# Altium PCB PCB1.PcbDoc (part 1 of 8)
Units mil, origin at the board's own origin, x right, y up, seen from the top; angles counter-clockwise.
Board outline 6000 x 4000 mil, 2 copper layers (Top Layer, Bottom Layer); 1253 components, 565 nets, 6549 pads, 0 vias.
Unrouted connection lines stored in the file: 1925.
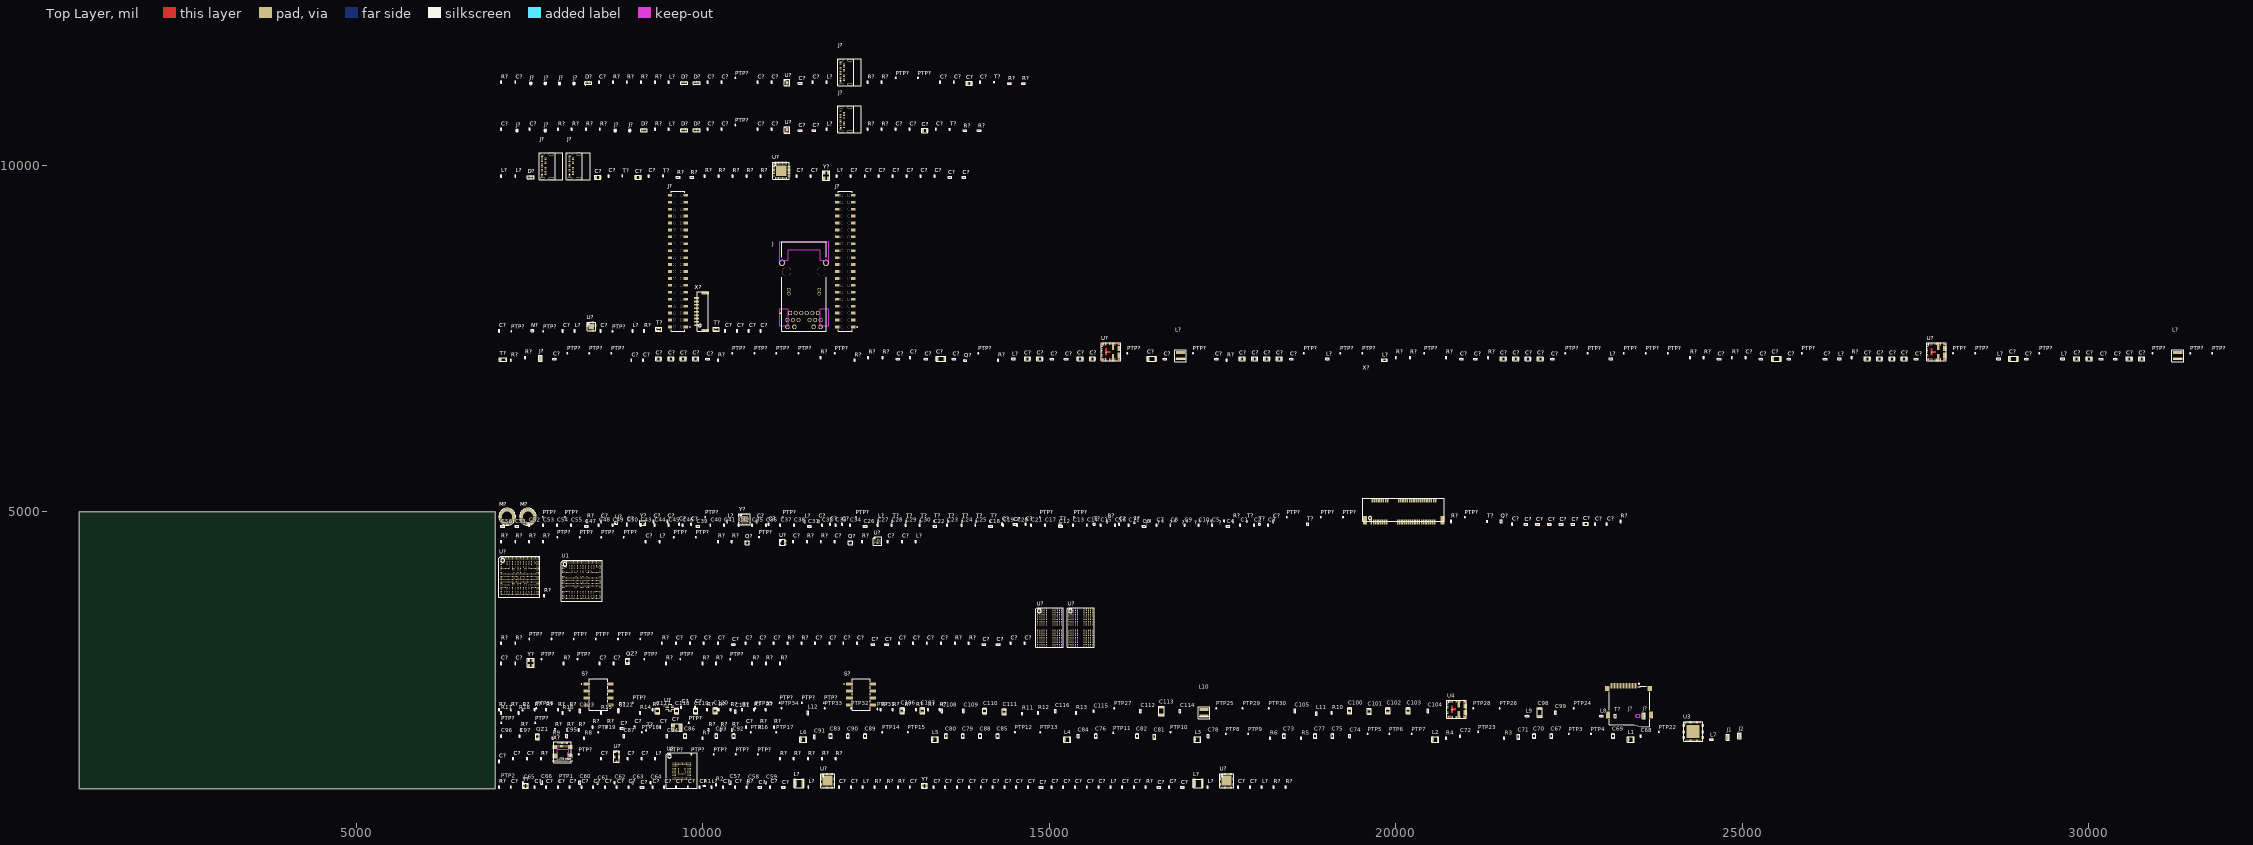
[diagram p0: Top Layer view]
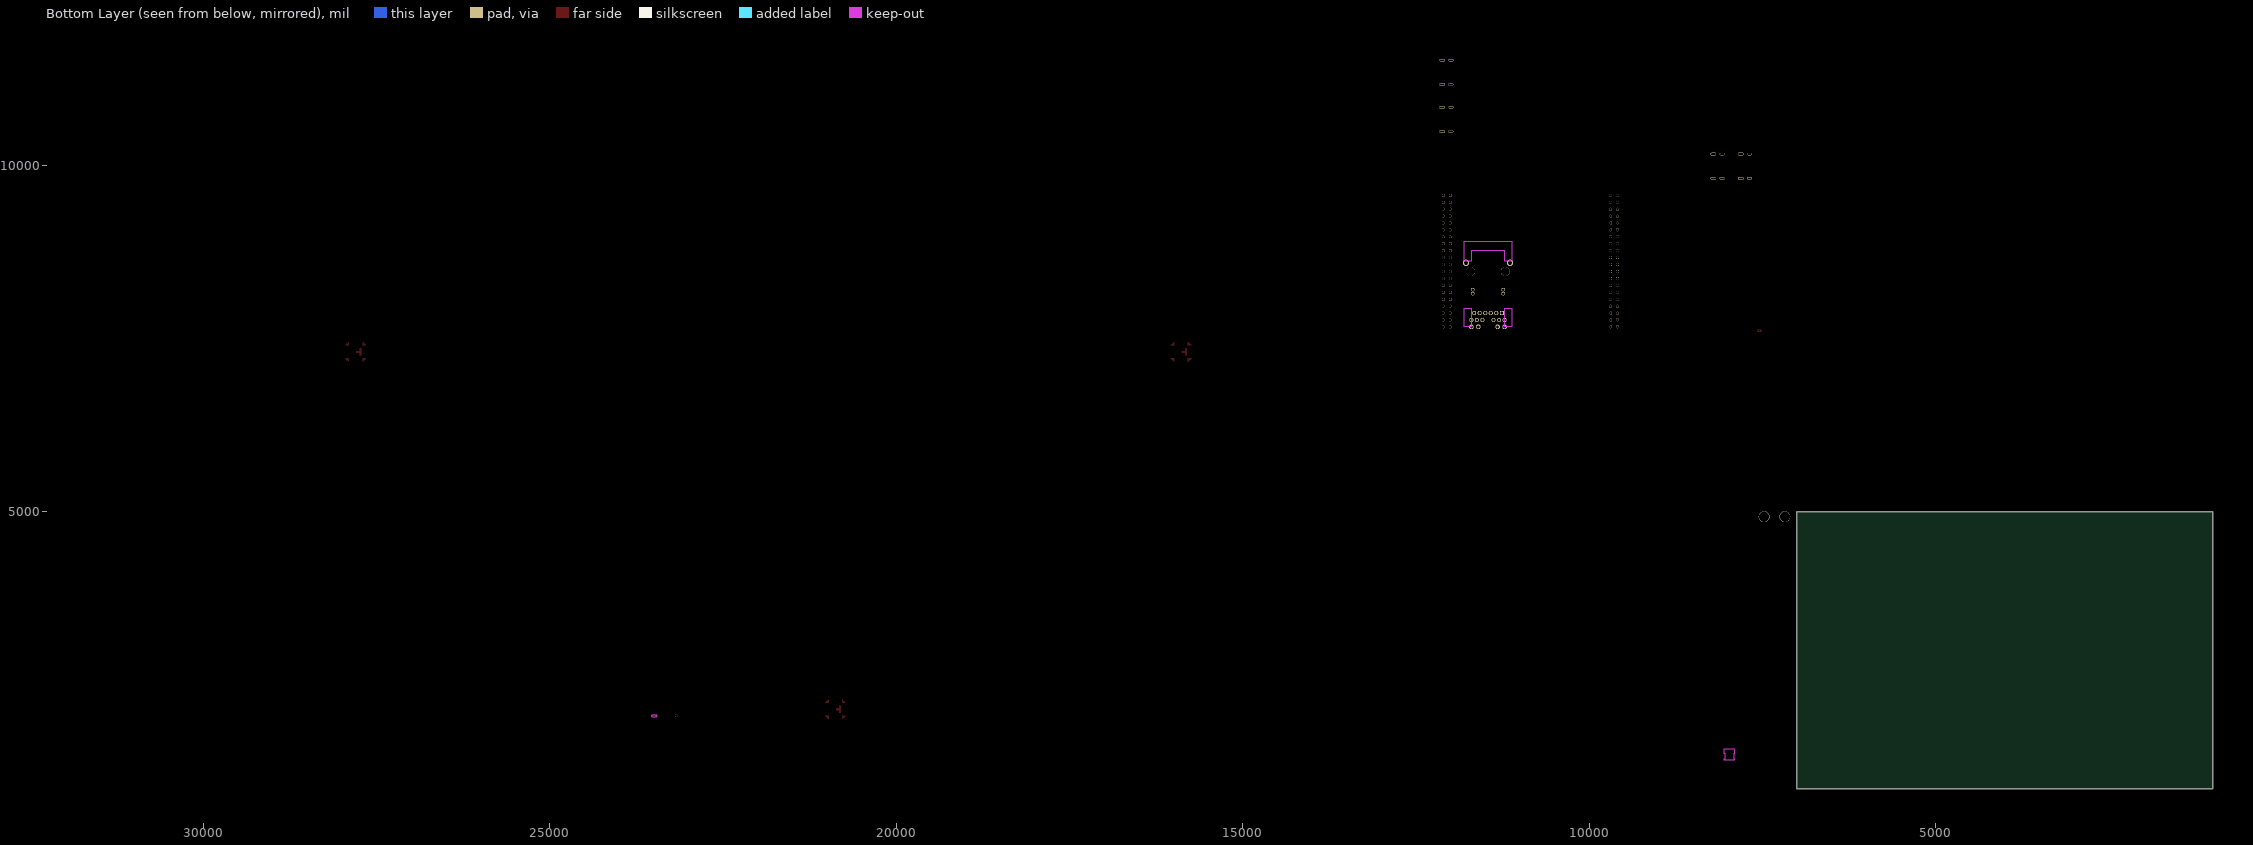
[diagram p1: Bottom Layer view, seen from below]

## Layer stack, top to bottom
Top Solder: solder mask 0.4, Solder Resist, Dk 3.5
Top Layer: signal copper 1.4
Dielectric 1: dielectric 12.6, FR-4, Dk 4.8
Bottom Layer: signal copper 1.4
Bottom Solder: solder mask 0.4, Solder Resist, Dk 3.5

## Board outline
1000,1000 7000,1000 7000,5000 1000,5000

## Design rules (kind name [scope] priority, off if disabled: settings)
Clearance [All] p1: gap=10 ignorepadtopadclearanceinfootprint=FALSE
DiffPairsRouting [All] p1: maxlimit=10 minlimit=10 mostfreqgap=10 toplayer_minwidth=15 toplayer_maxwidth=15 toplayer_prefwidth=15 bottomlayer_minwidth=15 bottomlayer_maxwidth=15 bottomlayer_prefwidth=15 maxuncoupledlength=500
MatchedLengths "Schematic Matched Net Lengths_7" [InNetClass('Ethernet')] p1: tolerance=15.75 checknetsindiffpair=TRUE checkdiffpairvsdiffpair=FALSE checkxsignals=FALSE checkothers=FALSE
MatchedLengths "Schematic Matched Net Lengths_6" [InNetClass('USB')] p2: tolerance=11.81 checknetsindiffpair=TRUE checkdiffpairvsdiffpair=FALSE checkxsignals=FALSE checkothers=FALSE
MatchedLengths "Schematic Matched Net Lengths_5" [InNetClass('PCIe')] p3: tolerance=3.94 checknetsindiffpair=TRUE checkdiffpairvsdiffpair=FALSE checkxsignals=FALSE checkothers=FALSE
MatchedLengths "Schematic Matched Net Lengths_4" [InNetClass('HDMI')] p4: tolerance=3.94 checknetsindiffpair=TRUE checkdiffpairvsdiffpair=FALSE checkxsignals=FALSE checkothers=FALSE
MatchedLengths "Schematic Matched Net Lengths_3" [InNetClass('Ethernet')] p5: tolerance=15.75 checknetsindiffpair=TRUE checkdiffpairvsdiffpair=FALSE checkxsignals=FALSE checkothers=FALSE
MatchedLengths "Schematic Matched Net Lengths_2" [InNetClass('USB')] p6: tolerance=11.81 checknetsindiffpair=TRUE checkdiffpairvsdiffpair=FALSE checkxsignals=FALSE checkothers=FALSE
MatchedLengths "Schematic Matched Net Lengths_1" [InNetClass('PCIe')] p7: tolerance=3.94 checknetsindiffpair=TRUE checkdiffpairvsdiffpair=FALSE checkxsignals=FALSE checkothers=FALSE
MatchedLengths "Schematic Matched Net Lengths" [InNetClass('HDMI')] p8: tolerance=3.94 checknetsindiffpair=TRUE checkdiffpairvsdiffpair=FALSE checkxsignals=FALSE checkothers=FALSE
PolygonConnect [All] p1: connectstyle=Relief reliefconductorwidth=10 reliefentries=4 polygonreliefangle="90 Angle" airgapwidth=10
RoutingVias [All] p1: holewidth=28 width=50 viastyle="Through Hole" minholewidth=28 minwidth=50 maxholewidth=28 maxwidth=50
SolderMaskExpansion [All] p1: expansion=4 istentingtop=FALSE
SupplyNets "Schematic Supply Nets_43" [InNet('3V3_ETH1_VDD')] p1: voltage=0.000
SupplyNets "Schematic Supply Nets_42" [InNet('1V8_PER')] p2: voltage=0.000
SupplyNets "Schematic Supply Nets_41" [InNet('VBUS_SMPS_FILT')] p3: voltage=0.000
SupplyNets "Schematic Supply Nets_40" [InNet('HDMI_5V0')] p4: voltage=0.000
SupplyNets "Schematic Supply Nets_39" [InNet('5V0_SMPS_RBC')] p5: voltage=0.000
SupplyNets "Schematic Supply Nets_38" [InNet('VDD_1V8_DIG')] p6: voltage=0.000
SupplyNets "Schematic Supply Nets_37" [InNet('3V3_ETH2_VDDA')] p7: voltage=0.000
SupplyNets "Schematic Supply Nets_36" [InNet('VBUS_RBC_FILT')] p8: voltage=0.000
SupplyNets "Schematic Supply Nets_35" [InNet('VBUS_SMPS')] p9: voltage=0.000
SupplyNets "Schematic Supply Nets_34" [InNet('3V3_ETH1_VDDA')] p10: voltage=0.000
SupplyNets "Schematic Supply Nets_33" [InNet('VBUS_RF_FILT')] p11: voltage=0.000
SupplyNets "Schematic Supply Nets_32" [InNet('mPCIe_SMPS_3V3')] p12: voltage=0.000
SupplyNets "Schematic Supply Nets_31" [InNet('3V3_USBHUB')] p13: voltage=0.000
SupplyNets "Schematic Supply Nets_30" [InNet('3V3_ETH2_VDD')] p14: voltage=0.000
SupplyNets "Schematic Supply Nets_29" [InNet('3V3_ETH1_VDD')] p15: voltage=0.000
SupplyNets "Schematic Supply Nets_28" [InNet('1V8_PER')] p16: voltage=0.000
SupplyNets "Schematic Supply Nets_27" [InNet('VBUS_SMPS_FILT')] p17: voltage=0.000
SupplyNets "Schematic Supply Nets_26" [InNet('HDMI_5V0')] p18: voltage=0.000
SupplyNets "Schematic Supply Nets_25" [InNet('5V0_SMPS_RBC')] p19: voltage=0.000
SupplyNets "Schematic Supply Nets_24" [InNet('VDD_1V8_DIG')] p20: voltage=0.000
SupplyNets "Schematic Supply Nets_23" [InNet('3V3_ETH2_VDDA')] p21: voltage=0.000
SupplyNets "Schematic Supply Nets_22" [InNet('VBUS_RBC_FILT')] p22: voltage=0.000
SupplyNets "Schematic Supply Nets_21" [InNet('VBUS_SMPS')] p23: voltage=0.000
SupplyNets "Schematic Supply Nets_20" [InNet('3V3_ETH1_VDDA')] p24: voltage=0.000
SupplyNets "Schematic Supply Nets_9" [InNet('VBUS_RF_FILT')] p25: voltage=0.000
SupplyNets "Schematic Supply Nets_8" [InNet('mPCIe_SMPS_3V3')] p26: voltage=0.000
SupplyNets "Schematic Supply Nets_7" [InNet('3V3_USBHUB')] p27: voltage=0.000
SupplyNets "Schematic Supply Nets_6" [InNet('3V3_ETH2_VDD')] p28: voltage=0.000
SupplyNets "Schematic Supply Nets_5" [InNet('5V0_SMPS')] p29: voltage=0.000
SupplyNets "Schematic Supply Nets_4" [InNet('VIN_SMPS')] p30: voltage=0.000
SupplyNets "Schematic Supply Nets_3" [InNet('3V3_SMPS')] p31: voltage=0.000
SupplyNets "Schematic Supply Nets_2" [InNet('VSYS_5V')] p32: voltage=0.000
SupplyNets "Schematic Supply Nets_1" [InNet('VSD_3V3')] p33: voltage=0.000
SupplyNets "Schematic Supply Nets" [InNet('VIN_SMPS_FILT')] p34: voltage=0.000
SupplyNets "Schematic Supply Nets_19" [InNet('NVCC_DRAM_1V1')] p35: voltage=0.000
SupplyNets "Schematic Supply Nets_18" [InNet('VDD_SNVS_0V8')] p36: voltage=0.000
SupplyNets "Schematic Supply Nets_17" [InNet('VDD_SOC')] p37: voltage=0.000
SupplyNets "Schematic Supply Nets_16" [InNet('VDD_3V3')] p38: voltage=0.000
SupplyNets "Schematic Supply Nets_15" [InNet('VDD_1V8')] p39: voltage=0.000
SupplyNets "Schematic Supply Nets_14" [InNet('GND')] p40: voltage=0.000
SupplyNets "Schematic Supply Nets_13" [InNet('VDD_ARM')] p41: voltage=0.000
SupplyNets "Schematic Supply Nets_12" [InNet('NVCC_SD2')] p42: voltage=0.000
SupplyNets "Schematic Supply Nets_11" [InNet('NVCC_SNVS_1V8')] p43: voltage=0.000
SupplyNets "Schematic Supply Nets_10" [InNet('VDDA_1V8')] p44: voltage=0.000
Width [All] p1: maxlimit=10 minlimit=10 preferedwidth=10
29 further rules are at their usual default settings.

## Classes and differential pairs
differential pair class 100: **LAN2_TXRXA **LAN2_TXRXB **LAN2_TXRXC **LAN2_TXRXD *LAN1_TXRXA *LAN1_TXRXB *LAN1_TXRXC *LAN1_TXRXD *LAN2_TXRXA *LAN2_TXRXB *LAN2_TXRXC *LAN2_TXRXD HDMI_TX0 HDMI_TX1 HDMI_TX2 HDMI_TXC LAN1_TXRXA LAN1_TXRXB LAN1_TXRXC LAN1_TXRXD LAN2_TXRXA LAN2_TXRXB LAN2_TXRXC LAN2_TXRXD
differential pair class 90: *PER1_TX1 *PER1_TX2 *PER2_TX1 *PER2_TX2 *USB_mPCIe PER1_RX1 PER1_RX2 PER1_TX1 PER1_TX2 PER2_RX1 PER2_RX2 PER2_TX1 PER2_TX2 USB1_D USB1_RX USB1_TX USB2_D USB2_HUB_UP USB2_RX USB2_TX USB_hub2 USB_hub3 USB_mPCIe
differential pair class 85: *mPCIe_CON_CLK *mPCIe_RX *mPCIe_TX DRAM_CK_A DRAM_CK_B DRAM_SDQS0_A DRAM_SDQS0_B DRAM_SDQS1_A DRAM_SDQS1_B mPCIe_CON_CLK mPCIe_RX mPCIe_TX PCIE_CLK PCIE_RX PCIE_TX
net class USB: *PER1_TX1_N *PER1_TX1_P *PER1_TX2_N *PER1_TX2_P *PER2_TX1_N *PER2_TX1_P *PER2_TX2_N *PER2_TX2_P *USB_mPCIe_N *USB_mPCIe_P PER1_RX1_N PER1_RX1_P PER1_RX2_N PER1_RX2_P PER1_TX1_N PER1_TX1_P PER1_TX2_N PER1_TX2_P PER2_RX1_N PER2_RX1_P PER2_RX2_N PER2_RX2_P PER2_TX1_N PER2_TX1_P PER2_TX2_N PER2_TX2_P USB1_D_N USB1_D_P USB1_RX_N USB1_RX_P USB1_TX_N USB1_TX_P USB2_D_N USB2_D_P USB2_HUB_UP_N USB2_HUB_UP_P USB2_RX_N USB2_RX_P USB2_TX_N USB2_TX_P USB_hub2_N USB_hub2_P USB_hub3_N USB_hub3_P USB_mPCIe_N USB_mPCIe_P
net class SINGLE: DRAM_CA0_A DRAM_CA0_B DRAM_CA1_A DRAM_CA1_B DRAM_CA2_A DRAM_CA2_B DRAM_CA3_A DRAM_CA3_B DRAM_CA4_A DRAM_CA4_B DRAM_CA5_A DRAM_CA5_B DRAM_CKE0_A DRAM_CKE0_B DRAM_CKE1_A DRAM_CKE1_B DRAM_DATA0_A DRAM_DATA0_B DRAM_DATA1_A DRAM_DATA1_B DRAM_DATA2_A DRAM_DATA2_B DRAM_DATA3_A DRAM_DATA3_B DRAM_DATA4_A DRAM_DATA4_B DRAM_DATA5_A DRAM_DATA5_B DRAM_DATA6_A DRAM_DATA6_B DRAM_DATA7_A DRAM_DATA7_B DRAM_DATA8_A DRAM_DATA8_B DRAM_DATA9_A DRAM_DATA9_B DRAM_DATA10_A DRAM_DATA10_B DRAM_DATA11_A DRAM_DATA11_B DRAM_DATA12_A DRAM_DATA12_B DRAM_DATA13_A DRAM_DATA13_B DRAM_DATA14_A DRAM_DATA14_B DRAM_DATA15_A DRAM_DATA15_B DRAM_DMI0_A DRAM_DMI0_B DRAM_DMI1_A DRAM_DMI1_B DRAM_nCS0_A DRAM_nCS0_B DRAM_nCS1_A DRAM_nCS1_B
net class SDIO: SD1_CLK SD1_CMD SD1_DATA0 SD1_DATA1 SD1_DATA2 SD1_DATA3 SD1_DATA4 SD1_DATA5 SD1_DATA6 SD1_DATA7 SD1_STROBE SD2_CLK SD2_CMD SD2_DATA0 SD2_DATA1 SD2_DATA2 SD2_DATA3
net class PCIe: *mPCIe_CON_CLK_N *mPCIe_CON_CLK_P *mPCIe_RX_N *mPCIe_RX_P *mPCIe_TX_N *mPCIe_TX_P mPCIe_CON_CLK_N mPCIe_CON_CLK_P mPCIe_RX_N mPCIe_RX_P mPCIe_TX_N mPCIe_TX_P PCIE_CLK_N PCIE_CLK_P PCIE_RX_N PCIE_RX_P PCIE_TX_N PCIE_TX_P
net class HDMI: HDMI_TX0_N HDMI_TX0_P HDMI_TX1_N HDMI_TX1_P HDMI_TX2_N HDMI_TX2_P HDMI_TXC_N HDMI_TXC_P
net class Ethernet: **LAN2_TXRXA_N **LAN2_TXRXA_P **LAN2_TXRXB_N **LAN2_TXRXB_P **LAN2_TXRXC_N **LAN2_TXRXC_P **LAN2_TXRXD_N **LAN2_TXRXD_P *LAN1_TXRXA_N *LAN1_TXRXA_P *LAN1_TXRXB_N *LAN1_TXRXB_P *LAN1_TXRXC_N *LAN1_TXRXC_P *LAN1_TXRXD_N *LAN1_TXRXD_P *LAN2_TXRXA_N *LAN2_TXRXA_P *LAN2_TXRXB_N *LAN2_TXRXB_P *LAN2_TXRXC_N *LAN2_TXRXC_P *LAN2_TXRXD_N *LAN2_TXRXD_P LAN1_TXRXA_N LAN1_TXRXA_P LAN1_TXRXB_N LAN1_TXRXB_P LAN1_TXRXC_N LAN1_TXRXC_P LAN1_TXRXD_N LAN1_TXRXD_P LAN2_TXRXA_N LAN2_TXRXA_P LAN2_TXRXB_N LAN2_TXRXB_P LAN2_TXRXC_N LAN2_TXRXC_P LAN2_TXRXD_N LAN2_TXRXD_P
net class DRAM: DRAM_CK_A_N DRAM_CK_A_P DRAM_CK_B_N DRAM_CK_B_P DRAM_SDQS0_A_N DRAM_SDQS0_A_P DRAM_SDQS0_B_N DRAM_SDQS0_B_P DRAM_SDQS1_A_N DRAM_SDQS1_A_P DRAM_SDQS1_B_N DRAM_SDQS1_B_P
component class USB_PER2: C? D? J? L? PTP? R? T? U?
component class USB_PER1: C? D? J? L? PTP? R? T? U?
component class USB_HUB: C? D? J? L? PTP? R? T? U? Y?
component class SYSTEM_INTERFACE: C? J J? L? N? PTP? R? T? U? X?
component class mPCIe_Slot: 1? ? C? L? M? PTP? Q? R? STP? T? U? X? Y?
component class IO_EXPANDER: C? L? PTP? Q? R? U?
component class IMX8_PHY: C? PTP? R? U?
component class IMX8_LPDDR4: C? PTP? R? U1 U?
component class IMX8_IO: C? PTP? QZ? R? Y?
component class IMX8_INTERFACE: C? PTP? R? S? U?
component class IMX8_DISPLAY: C? L? PTP? R? T? U? X?
component class ETHERNET: C? L? R? U? Y?
net class SEC: I2C1_SCL I2C1_SDA I2C2_SCL I2C2_SDA SD3_CLK SD3_CMD SD3_DATA0 SD3_DATA1 SD3_DATA2 SD3_DATA3 SD3_DATA4 SD3_DATA5 SD3_DATA6 SD3_DATA7
component class SMPS: C98 C99 C100 C101 C102 C103 C104 C105 C106 C107 C108 C109 C110 C111 C112 C113 C114 C115 C116 C117 C118 C119 C120 C121 C122 C123 C? CR? F? J? L8 L9 L10 L11 L12 L? PTP24 PTP25 PTP26 PTP27 PTP28 PTP29 PTP30 PTP31 PTP32 PTP33 PTP34 PTP35 PTP36 PTP? Q? R10 R11 R12 R13 R14 R15 R16 R17 R18 R? T? U4 U?
component class IMX8_PMIC: C67 C68 C69 C70 C71 C72 C73 C74 C75 C76 C77 C78 C79 C80 C81 C82 C83 C84 C85 C86 C87 C88 C89 C90 C91 C92 C93 C94 C95 C96 C97 J1 J2 L1 L2 L3 L4 L5 L6 L7 PTP3 PTP4 PTP5 PTP6 PTP7 PTP8 PTP9 PTP10 PTP11 PTP12 PTP13 PTP14 PTP15 PTP16 PTP17 PTP18 PTP19 PTP20 PTP21 PTP22 PTP23 QZ1 R3 R4 R5 R6 R7 R8 R9 U3
component class IMX8_eMMC: C57 C58 C59 C60 C61 C62 C63 C64 C65 C66 C? J? PTP1 PTP2 PTP? R1 R2 R? T? U2 U?
component class IMX8_PWR: C1 C2 C3 C4 C5 C6 C7 C8 C9 C10 C11 C12 C13 C14 C15 C16 C17 C18 C19 C20 C21 C22 C23 C24 C25 C26 C27 C28 C29 C30 C31 C32 C33 C34 C35 C36 C37 C38 C39 C40 C41 C42 C43 C44 C45 C46 C47 C48 C49 C50 C51 C52 C53 C54 C55 C56
differential pair USB_mPCIe: +USB_mPCIe_P -USB_mPCIe_N
differential pair USB_hub3: +USB_hub3_P -USB_hub3_N
differential pair USB_hub2: +USB_hub2_P -USB_hub2_N
differential pair USB2_TX: +USB2_TX_P -USB2_TX_N
differential pair USB2_RX: +USB2_RX_P -USB2_RX_N
differential pair USB2_HUB_UP: +USB2_HUB_UP_P -USB2_HUB_UP_N
differential pair USB2_D: +USB2_D_P -USB2_D_N
differential pair USB1_TX: +USB1_TX_P -USB1_TX_N
differential pair USB1_RX: +USB1_RX_P -USB1_RX_N
differential pair USB1_D: +USB1_D_P -USB1_D_N
differential pair PER2_TX2: +PER2_TX2_P -PER2_TX2_N
differential pair PER2_TX1: +PER2_TX1_P -PER2_TX1_N
differential pair PER2_RX2: +PER2_RX2_P -PER2_RX2_N
differential pair PER2_RX1: +PER2_RX1_P -PER2_RX1_N
differential pair PER1_TX2: +PER1_TX2_P -PER1_TX2_N
differential pair PER1_TX1: +PER1_TX1_P -PER1_TX1_N
differential pair PER1_RX2: +PER1_RX2_P -PER1_RX2_N
differential pair PER1_RX1: +PER1_RX1_P -PER1_RX1_N
differential pair PCIE_TX: +PCIE_TX_P -PCIE_TX_N
differential pair PCIE_RX: +PCIE_RX_P -PCIE_RX_N
differential pair PCIE_CLK: +PCIE_CLK_P -PCIE_CLK_N
differential pair mPCIe_TX: +mPCIe_TX_P -mPCIe_TX_N
differential pair mPCIe_RX: +mPCIe_RX_P -mPCIe_RX_N
differential pair mPCIe_CON_CLK: +mPCIe_CON_CLK_P -mPCIe_CON_CLK_N
differential pair LAN2_TXRXD: +LAN2_TXRXD_P -LAN2_TXRXD_N
differential pair LAN2_TXRXC: +LAN2_TXRXC_P -LAN2_TXRXC_N
differential pair LAN2_TXRXB: +LAN2_TXRXB_P -LAN2_TXRXB_N
differential pair LAN2_TXRXA: +LAN2_TXRXA_P -LAN2_TXRXA_N
differential pair LAN1_TXRXD: +LAN1_TXRXD_P -LAN1_TXRXD_N
differential pair LAN1_TXRXC: +LAN1_TXRXC_P -LAN1_TXRXC_N
differential pair LAN1_TXRXB: +LAN1_TXRXB_P -LAN1_TXRXB_N
differential pair LAN1_TXRXA: +LAN1_TXRXA_P -LAN1_TXRXA_N
differential pair HDMI_TXC: +HDMI_TXC_P -HDMI_TXC_N
differential pair HDMI_TX2: +HDMI_TX2_P -HDMI_TX2_N
differential pair HDMI_TX1: +HDMI_TX1_P -HDMI_TX1_N
differential pair HDMI_TX0: +HDMI_TX0_P -HDMI_TX0_N
differential pair DRAM_SDQS1_B: +DRAM_SDQS1_B_P -DRAM_SDQS1_B_N
differential pair DRAM_SDQS1_A: +DRAM_SDQS1_A_P -DRAM_SDQS1_A_N
differential pair DRAM_SDQS0_B: +DRAM_SDQS0_B_P -DRAM_SDQS0_B_N
differential pair DRAM_SDQS0_A: +DRAM_SDQS0_A_P -DRAM_SDQS0_A_N
differential pair DRAM_CK_B: +DRAM_CK_B_P -DRAM_CK_B_N
differential pair DRAM_CK_A: +DRAM_CK_A_P -DRAM_CK_A_N
differential pair *USB_mPCIe: +*USB_mPCIe_P -*USB_mPCIe_N
differential pair *PER2_TX2: +*PER2_TX2_P -*PER2_TX2_N
differential pair *PER2_TX1: +*PER2_TX1_P -*PER2_TX1_N
differential pair *PER1_TX2: +*PER1_TX2_P -*PER1_TX2_N
differential pair *PER1_TX1: +*PER1_TX1_P -*PER1_TX1_N
differential pair *mPCIe_TX: +*mPCIe_TX_P -*mPCIe_TX_N
differential pair *mPCIe_RX: +*mPCIe_RX_P -*mPCIe_RX_N
differential pair *mPCIe_CON_CLK: +*mPCIe_CON_CLK_P -*mPCIe_CON_CLK_N
differential pair *LAN2_TXRXD: +*LAN2_TXRXD_P -*LAN2_TXRXD_N
differential pair *LAN2_TXRXC: +*LAN2_TXRXC_P -*LAN2_TXRXC_N
differential pair *LAN2_TXRXB: +*LAN2_TXRXB_P -*LAN2_TXRXB_N
differential pair *LAN2_TXRXA: +*LAN2_TXRXA_P -*LAN2_TXRXA_N
differential pair *LAN1_TXRXD: +*LAN1_TXRXD_P -*LAN1_TXRXD_N
differential pair *LAN1_TXRXC: +*LAN1_TXRXC_P -*LAN1_TXRXC_N
differential pair *LAN1_TXRXB: +*LAN1_TXRXB_P -*LAN1_TXRXB_N
differential pair *LAN1_TXRXA: +*LAN1_TXRXA_P -*LAN1_TXRXA_N
differential pair **LAN2_TXRXD: +**LAN2_TXRXD_P -**LAN2_TXRXD_N
differential pair **LAN2_TXRXC: +**LAN2_TXRXC_P -**LAN2_TXRXC_N
differential pair **LAN2_TXRXB: +**LAN2_TXRXB_P -**LAN2_TXRXB_N
differential pair **LAN2_TXRXA: +**LAN2_TXRXA_P -**LAN2_TXRXA_N
differential pair USB_mPCIe: +USB_mPCIe_P -USB_mPCIe_N
differential pair USB_hub3: +USB_hub3_P -USB_hub3_N
differential pair USB_hub2: +USB_hub2_P -USB_hub2_N
differential pair USB2_TX: +USB2_TX_P -USB2_TX_N
differential pair USB2_RX: +USB2_RX_P -USB2_RX_N
differential pair USB2_HUB_UP: +USB2_HUB_UP_P -USB2_HUB_UP_N
differential pair USB2_D: +USB2_D_P -USB2_D_N
differential pair USB1_TX: +USB1_TX_P -USB1_TX_N
differential pair USB1_RX: +USB1_RX_P -USB1_RX_N
differential pair USB1_D: +USB1_D_P -USB1_D_N
differential pair PER2_TX2: +PER2_TX2_P -PER2_TX2_N
differential pair PER2_TX1: +PER2_TX1_P -PER2_TX1_N
differential pair PER2_RX2: +PER2_RX2_P -PER2_RX2_N
differential pair PER2_RX1: +PER2_RX1_P -PER2_RX1_N
differential pair PER1_TX2: +PER1_TX2_P -PER1_TX2_N
differential pair PER1_TX1: +PER1_TX1_P -PER1_TX1_N
differential pair PER1_RX2: +PER1_RX2_P -PER1_RX2_N
differential pair PER1_RX1: +PER1_RX1_P -PER1_RX1_N
differential pair PCIE_TX: +PCIE_TX_P -PCIE_TX_N
differential pair PCIE_RX: +PCIE_RX_P -PCIE_RX_N
differential pair PCIE_CLK: +PCIE_CLK_P -PCIE_CLK_N
differential pair mPCIe_TX: +mPCIe_TX_P -mPCIe_TX_N
differential pair mPCIe_RX: +mPCIe_RX_P -mPCIe_RX_N
differential pair mPCIe_CON_CLK: +mPCIe_CON_CLK_P -mPCIe_CON_CLK_N
differential pair LAN2_TXRXD: +LAN2_TXRXD_P -LAN2_TXRXD_N
differential pair LAN2_TXRXC: +LAN2_TXRXC_P -LAN2_TXRXC_N
differential pair LAN2_TXRXB: +LAN2_TXRXB_P -LAN2_TXRXB_N
differential pair LAN2_TXRXA: +LAN2_TXRXA_P -LAN2_TXRXA_N
differential pair LAN1_TXRXD: +LAN1_TXRXD_P -LAN1_TXRXD_N
differential pair LAN1_TXRXC: +LAN1_TXRXC_P -LAN1_TXRXC_N
differential pair LAN1_TXRXB: +LAN1_TXRXB_P -LAN1_TXRXB_N
differential pair LAN1_TXRXA: +LAN1_TXRXA_P -LAN1_TXRXA_N
differential pair HDMI_TXC: +HDMI_TXC_P -HDMI_TXC_N
differential pair HDMI_TX2: +HDMI_TX2_P -HDMI_TX2_N
differential pair HDMI_TX1: +HDMI_TX1_P -HDMI_TX1_N
differential pair HDMI_TX0: +HDMI_TX0_P -HDMI_TX0_N
differential pair DRAM_SDQS1_B: +DRAM_SDQS1_B_P -DRAM_SDQS1_B_N
differential pair DRAM_SDQS1_A: +DRAM_SDQS1_A_P -DRAM_SDQS1_A_N
differential pair DRAM_SDQS0_B: +DRAM_SDQS0_B_P -DRAM_SDQS0_B_N
differential pair DRAM_SDQS0_A: +DRAM_SDQS0_A_P -DRAM_SDQS0_A_N
differential pair DRAM_CK_B: +DRAM_CK_B_P -DRAM_CK_B_N
differential pair DRAM_CK_A: +DRAM_CK_A_P -DRAM_CK_A_N
differential pair *USB_mPCIe: +*USB_mPCIe_P -*USB_mPCIe_N
differential pair *PER2_TX2: +*PER2_TX2_P -*PER2_TX2_N
differential pair *PER2_TX1: +*PER2_TX1_P -*PER2_TX1_N
differential pair *PER1_TX2: +*PER1_TX2_P -*PER1_TX2_N
differential pair *PER1_TX1: +*PER1_TX1_P -*PER1_TX1_N
differential pair *mPCIe_TX: +*mPCIe_TX_P -*mPCIe_TX_N
differential pair *mPCIe_RX: +*mPCIe_RX_P -*mPCIe_RX_N
differential pair *mPCIe_CON_CLK: +*mPCIe_CON_CLK_P -*mPCIe_CON_CLK_N
differential pair *LAN2_TXRXD: +*LAN2_TXRXD_P -*LAN2_TXRXD_N
differential pair *LAN2_TXRXC: +*LAN2_TXRXC_P -*LAN2_TXRXC_N
differential pair *LAN2_TXRXB: +*LAN2_TXRXB_P -*LAN2_TXRXB_N
differential pair *LAN2_TXRXA: +*LAN2_TXRXA_P -*LAN2_TXRXA_N
differential pair *LAN1_TXRXD: +*LAN1_TXRXD_P -*LAN1_TXRXD_N
differential pair *LAN1_TXRXC: +*LAN1_TXRXC_P -*LAN1_TXRXC_N
differential pair *LAN1_TXRXB: +*LAN1_TXRXB_P -*LAN1_TXRXB_N
differential pair *LAN1_TXRXA: +*LAN1_TXRXA_P -*LAN1_TXRXA_N
differential pair **LAN2_TXRXD: +**LAN2_TXRXD_P -**LAN2_TXRXD_N
differential pair **LAN2_TXRXC: +**LAN2_TXRXC_P -**LAN2_TXRXC_N
differential pair **LAN2_TXRXB: +**LAN2_TXRXB_P -**LAN2_TXRXB_N
differential pair **LAN2_TXRXA: +**LAN2_TXRXA_P -**LAN2_TXRXA_N

## Components (designator, comment, footprint, x,y, rotation, side; value= is the part's Value field where it differs from the comment)
1? "TVS_0201_004_EZAEG1N" TVS_0201_EZAEG 16230,4840 r0 top value=0.04pF
1? "TVS_0201_004_EZAEG1N" TVS_0201_EZAEG 16230,4840 r0 top value=0.04pF
? "TVS_0201_004_EZAEG1N" TVS_0201_EZAEG 17525,4865 r90 top value=0.04pF
? "TVS_0201_004_EZAEG1N" TVS_0201_EZAEG 16815,4865 r90 top value=0.04pF
? "TVS_0201_004_EZAEG1N" TVS_0201_EZAEG 16990,4865 r90 top value=0.04pF
? "TVS_0201_004_EZAEG1N" TVS_0201_EZAEG 17170,4865 r90 top value=0.04pF
? "TVS_0201_004_EZAEG1N" TVS_0201_EZAEG 16635,4865 r90 top value=0.04pF
? "TVS_0201_004_EZAEG1N" TVS_0201_EZAEG 17345,4865 r90 top value=0.04pF
? "TVS_0201_004_EZAEG1N" TVS_0201_EZAEG 16460,4865 r90 top value=0.04pF
? "TVS_0201_004_EZAEG1N" TVS_0201_EZAEG 17525,4865 r90 top value=0.04pF
? "TVS_0201_004_EZAEG1N" TVS_0201_EZAEG 16815,4865 r90 top value=0.04pF
? "TVS_0201_004_EZAEG1N" TVS_0201_EZAEG 16990,4865 r90 top value=0.04pF
? "TVS_0201_004_EZAEG1N" TVS_0201_EZAEG 17170,4865 r90 top value=0.04pF
? "TVS_0201_004_EZAEG1N" TVS_0201_EZAEG 16635,4865 r90 top value=0.04pF
? "TVS_0201_004_EZAEG1N" TVS_0201_EZAEG 17345,4865 r90 top value=0.04pF
? "TVS_0201_004_EZAEG1N" TVS_0201_EZAEG 16460,4865 r90 top value=0.04pF
C1 "CAP_0201_1uF_X6S" CAP_0201_UN1Q 17760,4805 r90 top value=1uF
C2 "CAP_0201_1uF_X6S" CAP_0201_UN1Q 17960,4805 r90 top value=1uF
C3 "CAP_0201_1uF_X6S" CAP_0201_UN1Q 18160,4805 r90 top value=1uF
C4 "CAP_0402_10u_X6S" CAP_0402_H09W07_UN1Q 17580,4785 r0 top value=10uF
C5 "CAP_0201_220n_10V_X6S" CAP_0201_UN1Q 17355,4805 r90 top value=220nF
C6 "CAP_0402_10u_X6S" CAP_0402_H09W07_UN1Q 16370,4785 r0 top value=10uF
C7 "CAP_0201_1uF_X6S" CAP_0201_UN1Q 16550,4805 r90 top value=1uF
C8 "CAP_0201_1uF_X6S" CAP_0201_UN1Q 16750,4805 r90 top value=1uF
C9 "CAP_0201_1uF_X6S" CAP_0201_UN1Q 16955,4805 r90 top value=1uF
C10 "CAP_0201_1uF_X6S" CAP_0201_UN1Q 17155,4805 r90 top value=1uF
C11 "CAP_0201_220n_10V_X6S" CAP_0201_UN1Q 16150,4805 r90 top value=220nF
C12 "CAP_0402_10u_X6S" CAP_0402_H09W07_UN1Q 15165,4785 r0 top value=10uF
C13 "CAP_0201_1uF_X6S" CAP_0201_UN1Q 15345,4805 r90 top value=1uF
C14 "CAP_0201_1uF_X6S" CAP_0201_UN1Q 15545,4805 r90 top value=1uF
C15 "CAP_0201_1uF_X6S" CAP_0201_UN1Q 15745,4805 r90 top value=1uF
C16 "CAP_0201_1uF_X6S" CAP_0201_UN1Q 15950,4805 r90 top value=1uF
C17 "CAP_0201_1uF_X6S" CAP_0201_UN1Q 14940,4805 r90 top value=1uF
C18 "CAP_0402_10u_X6S" CAP_0402_H09W07_UN1Q 14155,4785 r0 top value=10uF
C19 "CAP_0201_1uF_X6S" CAP_0201_UN1Q 14335,4805 r90 top value=1uF
C20 "CAP_0201_1uF_X6S" CAP_0201_UN1Q 14540,4805 r90 top value=1uF
C21 "CAP_0201_1uF_X6S" CAP_0201_UN1Q 14740,4805 r90 top value=1uF
C22 "CAP_0402_10u_X6S" CAP_0402_H09W07_UN1Q 13350,4785 r0 top value=10uF
C23 "CAP_0201_1uF_X6S" CAP_0201_UN1Q 13530,4805 r90 top value=1uF
C24 "CAP_0201_1uF_X6S" CAP_0201_UN1Q 13735,4805 r90 top value=1uF
C25 "CAP_0201_1uF_X6S" CAP_0201_UN1Q 13935,4805 r90 top value=1uF
C26 "CAP_0402_10u_X6S" CAP_0402_H09W07_UN1Q 12345,4785 r0 top value=10uF
C27 "CAP_0201_1uF_X6S" CAP_0201_UN1Q 12525,4805 r90 top value=1uF
C28 "CAP_0201_1uF_X6S" CAP_0201_UN1Q 12725,4805 r90 top value=1uF
C29 "CAP_0201_1uF_X6S" CAP_0201_UN1Q 12930,4805 r90 top value=1uF
C30 "CAP_0201_1uF_X6S" CAP_0201_UN1Q 13130,4805 r90 top value=1uF
C31 "CAP_0402_10u_X6S" CAP_0402_H09W07_UN1Q 11540,4785 r0 top value=10uF
C32 "CAP_0201_1uF_X6S" CAP_0201_UN1Q 11720,4805 r90 top value=1uF
C33 "CAP_0201_1uF_X6S" CAP_0201_UN1Q 11920,4805 r90 top value=1uF
C34 "CAP_0201_1uF_X6S" CAP_0201_UN1Q 12125,4805 r90 top value=1uF
C35 "CAP_0201_1uF_X6S" CAP_0201_UN1Q 10715,4805 r90 top value=1uF
C36 "CAP_0201_1uF_X6S" CAP_0201_UN1Q 10915,4805 r90 top value=1uF
C37 "CAP_0201_1uF_X6S" CAP_0201_UN1Q 11120,4805 r90 top value=1uF
C38 "CAP_0201_1uF_X6S" CAP_0201_UN1Q 11320,4805 r90 top value=1uF
C39 "CAP_0402_10u_X6S" CAP_0402_H09W07_UN1Q 9930,4785 r0 top value=10uF
C40 "CAP_0201_1uF_X6S" CAP_0201_UN1Q 10110,4805 r90 top value=1uF
C41 "CAP_0201_1uF_X6S" CAP_0201_UN1Q 10310,4805 r90 top value=1uF
C42 "CAP_0201_1uF_X6S" CAP_0201_UN1Q 10515,4805 r90 top value=1uF
C43 "CAP_0201_1uF_X6S" CAP_0201_UN1Q 9105,4805 r90 top value=1uF
C44 "CAP_0201_1uF_X6S" CAP_0201_UN1Q 9305,4805 r90 top value=1uF
C45 "CAP_0201_1uF_X6S" CAP_0201_UN1Q 9505,4805 r90 top value=1uF
C46 "CAP_0201_1uF_X6S" CAP_0201_UN1Q 9710,4805 r90 top value=1uF
C47 "CAP_0402_10u_X6S" CAP_0402_H09W07_UN1Q 8320,4785 r0 top value=10uF
C48 "CAP_0201_1uF_X6S" CAP_0201_UN1Q 8500,4805 r90 top value=1uF
C49 "CAP_0201_1uF_X6S" CAP_0201_UN1Q 8700,4805 r90 top value=1uF
C50 "CAP_0201_1uF_X6S" CAP_0201_UN1Q 8905,4805 r90 top value=1uF
C51 "CAP_0402_10u_X6S" CAP_0402_H09W07_UN1Q 7315,4785 r0 top value=10uF
C52 "CAP_0201_1uF_X6S" CAP_0201_UN1Q 7495,4805 r90 top value=1uF
C53 "CAP_0201_1uF_X6S" CAP_0201_UN1Q 7695,4805 r90 top value=1uF
C54 "CAP_0201_1uF_X6S" CAP_0201_UN1Q 7895,4805 r90 top value=1uF
C55 "CAP_0201_1uF_X6S" CAP_0201_UN1Q 8100,4805 r90 top value=1uF
C56 "CAP_0402_4u7_10V_X6S" CAP_0402_H09W07_UN1Q 7110,4785 r0 top value=4.7uF
C57 "CAP_0402_4u7_10V_X6S" CAP_0402_H09W07_UN1Q 10395,1090 r90 top value=4.7uF
C58 "CAP_0201_220n_10V_X6S" CAP_0201_UN1Q 10650,1090 r90 top value=220nF
C59 "CAP_0201_220n_10V_X6S" CAP_0201_UN1Q 10910,1090 r90 top value=220nF
C60 "CAP_0402_10u_X6S" CAP_0402_H09W07_UN1Q 8225,1090 r90 top value=10uF
C61 "CAP_0201_220n_10V_X6S" CAP_0201_UN1Q 8480,1080 r90 top value=220nF
C62 "CAP_0201_220n_10V_X6S" CAP_0201_UN1Q 8725,1090 r90 top value=220nF
C63 "CAP_0201_220n_10V_X6S" CAP_0201_UN1Q 8985,1090 r90 top value=220nF
C64 "CAP_0201_220n_10V_X6S" CAP_0201_UN1Q 9245,1090 r90 top value=220nF
C65 "CAP_0201_220n_10V_X6S" CAP_0201_UN1Q 7410,1090 r90 top value=220nF
C66 "CAP_0402_10u_X6S" CAP_0402_H09W07_UN1Q 7675,1090 r90 top value=10uF
C67 "CAP_0603_10u_10V_X7R" CAP_0603_UN1Q 22250,1760 r90 top value=10uF
C68 "CAP_0201_1uF_X6S" CAP_0201_UN1Q 23540,1760 r90 top value=1uF
C69 "CAP_0603_10u_10V_X7R" CAP_0603_UN1Q 23140,1760 r90 top value=10uF
C70 "CAP_0603_NA" CAP_0603_UN1Q 22000,1760 r90 top value=NA
C71 "CAP_0603_22u_6.3V_X6S" CAP_0603_UN1Q 21775,1750 r90 top value=22uF
C72 "CAP_0201_1uF_X6S" CAP_0201_UN1Q 20930,1760 r90 top value=1uF
C73 "CAP_0603_10u_10V_X7R" CAP_0603_UN1Q 18390,1760 r90 top value=10uF
C74 "CAP_0402_10u_X6S" CAP_0402_H09W07_UN1Q 19340,1760 r90 top value=10uF
C75 "CAP_0603_NA" CAP_0603_UN1Q 19090,1760 r90 top value=NA
C76 "CAP_0603_10u_10V_X7R" CAP_0603_UN1Q 15675,1760 r90 top value=10uF
C77 "CAP_0603_22u_6.3V_X6S" CAP_0603_UN1Q 18840,1760 r90 top value=22uF
C78 "CAP_0402_4u7_10V_X6S" CAP_0402_H09W07_UN1Q 17295,1760 r90 top value=4.7uF
C79 "CAP_0603_10u_10V_X7R" CAP_0603_UN1Q 13755,1760 r90 top value=10uF
C80 "CAP_0603_10u_10V_X7R" CAP_0603_UN1Q 13510,1760 r90 top value=10uF
C81 "CAP_0603_NA" CAP_0603_UN1Q 16520,1750 r90 top value=NA
C82 "CAP_0603_22u_6.3V_X6S" CAP_0603_UN1Q 16270,1760 r90 top value=22uF
C83 "CAP_0603_10u_10V_X7R" CAP_0603_UN1Q 11845,1760 r90 top value=10uF
C84 "CAP_0402_4u7_10V_X6S" CAP_0402_H09W07_UN1Q 15420,1760 r90 top value=4.7uF
C85 "CAP_0603_NA" CAP_0603_UN1Q 14255,1760 r90 top value=NA
C86 "CAP_0603_10u_10V_X7R" CAP_0603_UN1Q 9745,1760 r90 top value=10uF
C87 "CAP_0402_1uF_10V_X7R" CAP_0402_UN1Q 8860,1760 r90 top value=1uF
C88 "CAP_0603_22u_6.3V_X6S" CAP_0603_UN1Q 14005,1760 r90 top value=22uF
C89 "CAP_0603_NA" CAP_0603_UN1Q 12345,1760 r90 top value=NA
C90 "CAP_0603_22u_6.3V_X6S" CAP_0603_UN1Q 12095,1760 r90 top value=22uF
C91 "CAP_0402_1uF_10V_X7R" CAP_0402_UN1Q 11610,1750 r90 top value=1uF
C92 "CAP_0603_NA" CAP_0603_UN1Q 10445,1760 r90 top value=NA
C93 "CAP_0603_22u_6.3V_X6S" CAP_0603_UN1Q 10195,1760 r90 top value=22uF
C94 "CAP_0402_1uF_10V_X7R" CAP_0402_UN1Q 9485,1760 r90 top value=1uF
C95 "CAP_0402_4u7_10V_X6S" CAP_0402_H09W07_UN1Q 8035,1760 r90 top value=4.7uF
C96 "CAP_0201_12pF_RF_MATCHING" CAP_0201_UN1Q 7090,1760 r90 top value=12pF
C97 "CAP_0201_12pF_RF_MATCHING" CAP_0201_UN1Q 7355,1760 r90 top value=12pF
C98 "CAP_1206_10uF_X7R" CAP_1206_UN1Q 22080,2100 r90 top value=10uF
C99 "CAP_0402_100nF_50V" CAP_0402_UN1Q 22310,2100 r90 top value=100nF
C100 "CAP_0805_22uF_10V_X7R" CAP_0805_UN1Q 19335,2125 r90 top value=22uF
C101 "CAP_0805_22uF_10V_X7R" CAP_0805_UN1Q 19620,2115 r90 top value=22uF
C102 "CAP_0805_22uF_10V_X7R" CAP_0805_UN1Q 19890,2125 r90 top value=22uF
C103 "CAP_0805_22uF_10V_X7R" CAP_0805_UN1Q 20180,2125 r90 top value=22uF
C104 "CAP_0402_100nF_50V" CAP_0402_UN1Q 20465,2125 r90 top value=100nF
C105 "CAP_0402_100nF_50V" CAP_0402_UN1Q 18545,2125 r90 top value=100nF
C106 "CAP_0805_2u2_50V_X7R" CAP_0805_UN1Q 12880,2125 r90 top value=2.2uF
C107 "CAP_0805_2u2_50V_X7R" CAP_0805_UN1Q 13170,2125 r90 top value=2.2uF
C108 "CAP_0402_100nF_50V" CAP_0402_UN1Q 13455,2125 r90 top value=100nF
C109 "CAP_0402_22nF" CAP_0402_UN1Q 13765,2125 r90 top value=22nF
C110 "CAP_0805_2u2_50V_X7R" CAP_0805_UN1Q 14070,2120 r90 top value=2.2uF
C111 "CAP_0805_2u2_50V_X7R" CAP_0805_UN1Q 14350,2110 r90 top value=2.2uF
C112 "CAP_0402_100nF_50V" CAP_0402_UN1Q 16320,2120 r90 top value=100nF
C113 "CAP_1206_10uF_X7R" CAP_1206_UN1Q 16620,2120 r90 top value=10uF
C114 "CAP_0402_100nF_50V" CAP_0402_UN1Q 16890,2120 r90 top value=100nF
C115 "CAP_0201_1uF_X6S" CAP_0201_UN1Q 15640,2120 r90 top value=1uF
C116 "CAP_0402_100nF_50V" CAP_0402_UN1Q 15090,2120 r90 top value=100nF
C117 "CAP_0805_22uF_10V_X7R" CAP_0805_UN1Q 9345,2120 r90 top value=22uF
C118 "CAP_0805_22uF_10V_X7R" CAP_0805_UN1Q 9620,2120 r90 top value=22uF
C119 "CAP_0805_22uF_10V_X7R" CAP_0805_UN1Q 9900,2120 r90 top value=22uF
C120 "CAP_0805_22uF_10V_X7R" CAP_0805_UN1Q 10180,2125 r90 top value=22uF
C121 "CAP_0402_100nF_50V" CAP_0402_UN1Q 10470,2115 r90 top value=100nF
C122 "CAP_0402_100nF_50V" CAP_0402_UN1Q 8785,2125 r90 top value=100nF
C123 "CAP_0402_100nF_50V" CAP_0402_UN1Q 8225,2125 r90 top value=100nF
C? "CAP_0201_1uF_X6S" CAP_0201_UN1Q 11830,3100 r90 top value=1uF
C? "CAP_0402_10u_X6S" CAP_0402_H09W07_UN1Q 14060,3080 r0 top value=10uF
C? "CAP_0402_10u_X6S" CAP_0402_H09W07_UN1Q 12455,3080 r0 top value=10uF
C? "CAP_0201_1uF_X6S" CAP_0201_UN1Q 13440,3100 r90 top value=1uF
C? "CAP_0201_1uF_X6S" CAP_0201_UN1Q 14445,3100 r90 top value=1uF
C? "CAP_0201_1uF_X6S" CAP_0201_UN1Q 10220,3100 r90 top value=1uF
C? "CAP_0201_1uF_X6S" CAP_0201_UN1Q 12030,3100 r90 top value=1uF
C? "CAP_0201_1uF_X6S" CAP_0201_UN1Q 11625,3100 r90 top value=1uF
C? "CAP_0402_10u_X6S" CAP_0402_H09W07_UN1Q 10440,3080 r0 top value=10uF
C? "CAP_0201_1uF_X6S" CAP_0201_UN1Q 13235,3100 r90 top value=1uF
C? "CAP_0402_10u_X6S" CAP_0402_H09W07_UN1Q 12655,3080 r0 top value=10uF
C? "CAP_0201_1uF_X6S" CAP_0201_UN1Q 9815,3100 r90 top value=1uF
C? "CAP_0201_1uF_X6S" CAP_0201_UN1Q 14645,3100 r90 top value=1uF
C? "CAP_0201_1uF_X6S" CAP_0201_UN1Q 10820,3100 r90 top value=1uF
C? "CAP_1210_47uF_16V_X6S" CAP_1210_UN1Q_1 9625,1885 r0 top value=47uF
C? "CAP_0201_100n_X7S_16V" CAP_0201_UN1Q 9690,2180 r90 top value=100nF
C? "CAP_0201_100n_X7S_16V" CAP_0201_UN1Q 9890,2180 r90 top value=100nF
C? "CAP_0201_220n_10V_X6S" CAP_0201_UN1Q 9015,1890 r90 top value=220nF
C? "CAP_0201_100n_X7S_16V" CAP_0201_UN1Q 9385,1890 r90 top value=100nF
C? "CAP_0201_18p_RF_MATCHING" CAP_0201_UN1Q 10625,1890 r90 top value=18pF
C? "CAP_0201_12pF_RF_MATCHING" CAP_0201_UN1Q 8510,2810 r90 top value=12pF
C? "CAP_0402_10u_X6S" CAP_0402_H09W07_UN1Q 14265,3080 r0 top value=10uF
C? "CAP_0201_1uF_X6S" CAP_0201_UN1Q 9615,3100 r90 top value=1uF
C? "CAP_0201_1uF_X6S" CAP_0201_UN1Q 10015,3100 r90 top value=1uF
C? "CAP_0201_12pF_RF_MATCHING" CAP_0201_UN1Q 7295,2810 r90 top value=12pF
C? "CAP_0201_12pF_RF_MATCHING" CAP_0201_UN1Q 8715,2810 r90 top value=12pF
C? "CAP_0201_12pF_RF_MATCHING" CAP_0201_UN1Q 7090,2810 r90 top value=12pF
C? "CAP_0201_1uF_X6S" CAP_0201_UN1Q 12835,3100 r90 top value=1uF
C? "CAP_0201_1uF_X6S" CAP_0201_UN1Q 9490,4860 r90 top value=1uF
C? "CAP_0402_10u_X6S" CAP_0402_H09W07_UN1Q 22220,4815 r0 top value=10uF
C? "CAP_0201_15p" CAP_0201_UN1Q 8530,4860 r90 top value=15pF
C? "CAP_0201_100n_X7S_16V" CAP_0201_UN1Q 8905,4820 r90 top value=100nF
C? "CAP_0201_10n_16V" CAP_0201_UN1Q 18230,4860 r90 top value=10nF
C? "CAP_0201_100n_X7S_16V" CAP_0201_UN1Q 10950,4820 r90 top value=100nF
C? "CAP_0201_1uF_X6S" CAP_0201_UN1Q 11670,4860 r90 top value=1uF
C? "CAP_0402_10u_X6S" CAP_0402_H09W07_UN1Q 21880,4815 r0 top value=10uF
C? "CAP_0201_100n_X7S_16V" CAP_0201_UN1Q 11840,4820 r90 top value=100nF
C? "CAP_0402_10u_X6S" CAP_0402_H09W07_UN1Q 14510,4815 r0 top value=10uF
C? "CAP_0402_10u_X6S" CAP_0402_H09W07_UN1Q 22560,4815 r0 top value=10uF
C? "CAP_0201_100n_X7S_16V" CAP_0201_UN1Q 9660,4820 r90 top value=100nF
C? "CAP_0201_100n_X7S_16V" CAP_0201_UN1Q 21685,4820 r90 top value=100nF
C? "CAP_0201_100n_X7S_16V" CAP_0201_UN1Q 12010,4820 r90 top value=100nF
C? "CAP_0201_1uF_X6S" CAP_0201_UN1Q 12230,3100 r90 top value=1uF
C? "CAP_0201_1uF_X6S" CAP_0201_UN1Q 10620,3100 r90 top value=1uF
C? "CAP_0201_1uF_X6S" CAP_0201_UN1Q 13035,3100 r90 top value=1uF
C? "CAP_0201_1uF_X6S" CAP_0201_UN1Q 11025,3100 r90 top value=1uF
C? "CAP_0201_100n_X7S_16V" CAP_0201_UN1Q 12875,4570 r90 top value=100nF
C? "CAP_0201_100n_X7S_16V" CAP_0201_UN1Q 9175,4570 r90 top value=100nF
C? "CAP_0201_1uF_X6S" CAP_0201_UN1Q 11905,4570 r90 top value=1uF
C? "CAP_0201_100n_X7S_16V" CAP_0201_UN1Q 12670,4570 r90 top value=100nF
C? "CAP_0201_1uF_X6S" CAP_0201_UN1Q 11305,4570 r90 top value=1uF
C? "CAP_0201_1uF_X6S" CAP_0201_UN1Q 9615,1025 r90 top value=1uF
C? "CAP_0402_10u_X6S" CAP_0402_H09W07_UN1Q 16585,1020 r0 top value=10uF
C? "CAP_0201_100n_X7S_16V" CAP_0201_UN1Q 14695,1025 r90 top value=100nF
C? "CAP_0201_100n_X7S_16V" CAP_0201_UN1Q 14185,1025 r90 top value=100nF
C? "CAP_0201_1uF_X6S" CAP_0201_UN1Q 10295,1025 r90 top value=1uF
C? "CAP_0201_1uF_X6S" CAP_0201_UN1Q 15375,1025 r90 top value=1uF
C? "CAP_0201_100n_X7S_16V" CAP_0201_UN1Q 8760,1025 r90 top value=100nF
C? "CAP_0201_1uF_X6S" CAP_0201_UN1Q 17900,1025 r90 top value=1uF
C? "CAP_0201_15p" CAP_0201_UN1Q 7570,1025 r90 top value=15pF
C? "CAP_0201_100n_X7S_16V" CAP_0201_UN1Q 8930,1025 r90 top value=100nF
C? "CAP_0201_1uF_X6S" CAP_0201_UN1Q 10465,1025 r90 top value=1uF
C? "CAP_0201_100n_X7S_16V" CAP_0201_UN1Q 13670,1025 r90 top value=100nF
C? "CAP_0201_100n_X7S_16V" CAP_0201_UN1Q 15035,1025 r90 top value=100nF
C? "CAP_0201_100n_X7S_16V" CAP_0201_UN1Q 14525,1025 r90 top value=100nF
C? "CAP_0201_100n_X7S_16V" CAP_0201_UN1Q 8590,1025 r90 top value=100nF
C? "CAP_0201_1uF_X6S" CAP_0201_UN1Q 16225,1025 r90 top value=1uF
C? "CAP_0402_10u_X6S" CAP_0402_H09W07_UN1Q 11165,1020 r0 top value=10uF
C? "CAP_0201_100n_X7S_16V" CAP_0201_UN1Q 16735,1025 r90 top value=100nF
C? "CAP_0201_100n_X7S_16V" CAP_0201_UN1Q 10975,1025 r90 top value=100nF
C? "CAP_0201_1uF_X6S" CAP_0201_UN1Q 15205,1025 r90 top value=1uF
C? "CAP_0201_1uF_X6S" CAP_0201_UN1Q 9445,1025 r90 top value=1uF
C? "CAP_0201_100n_X7S_16V" CAP_0201_UN1Q 8080,1025 r90 top value=100nF
C? "CAP_0201_1uF_X6S" CAP_0201_UN1Q 11970,1025 r90 top value=1uF
C? "CAP_0201_1uF_X6S" CAP_0201_UN1Q 16055,1025 r90 top value=1uF
C? "CAP_0201_100n_X7S_16V" CAP_0201_UN1Q 9275,1025 r90 top value=100nF
C? "CAP_0402_10u_X6S" CAP_0402_H09W07_UN1Q 16925,1020 r0 top value=10uF
C? "CAP_0201_15p" CAP_0201_UN1Q 7230,1025 r90 top value=15pF
C? "CAP_0201_1uF_X6S" CAP_0201_UN1Q 17730,1025 r90 top value=1uF
C? "CAP_0201_100n_X7S_16V" CAP_0201_UN1Q 13500,1025 r90 top value=100nF
C? "CAP_0201_1uF_X6S" CAP_0201_UN1Q 7465,1435 r90 top value=1uF
C? "CAP_0201_100n_X7S_16V" CAP_0201_UN1Q 8420,1025 r90 top value=100nF
C? "CAP_0402_10u_X6S" CAP_0402_H09W07_UN1Q 14885,1020 r0 top value=10uF
C? "CAP_0402_10u_X6S" CAP_0402_H09W07_UN1Q 9125,1020 r0 top value=10uF
C? "CAP_0201_1uF_X6S" CAP_0201_UN1Q 8530,1435 r90 top value=1uF
C? "CAP_0201_2n2" CAP_0201_UN1Q 7060,1395 r90 top value=2.2nF
C? "CAP_0402_10u_X6S" CAP_0402_H09W07_UN1Q 8835,1870 r0 top value=10uF
C? "CAP_0201_100n_X7S_16V" CAP_0201_UN1Q 8915,1435 r90 top value=100nF
C? "CAP_0201_100n_X7S_16V" CAP_0201_UN1Q 9115,1435 r90 top value=100nF
C? "CAP_0201_1uF_X6S" CAP_0201_UN1Q 7265,1435 r90 top value=1uF
C? "CAP_0201_1uF_X6S" CAP_0201_UN1Q 9785,1025 r90 top value=1uF
C? "CAP_0201_100n_X7S_16V" CAP_0201_UN1Q 14015,1025 r90 top value=100nF
C? "CAP_0201_100n_X7S_16V" CAP_0201_UN1Q 13845,1025 r90 top value=100nF
C? "CAP_0201_1uF_X6S" CAP_0201_UN1Q 12140,1025 r90 top value=1uF
C? "CAP_0201_1uF_X6S" CAP_0201_UN1Q 15715,1025 r90 top value=1uF
C? "CAP_0201_100n_X7S_16V" CAP_0201_UN1Q 14355,1025 r90 top value=100nF
C? "CAP_0201_15p" CAP_0201_UN1Q 12990,1025 r90 top value=15pF
C? "CAP_0201_100n_X7S_16V" CAP_0201_UN1Q 8250,1025 r90 top value=100nF
C? "CAP_0201_1uF_X6S" CAP_0201_UN1Q 9955,1025 r90 top value=1uF
C? "CAP_0201_1uF_X6S" CAP_0201_UN1Q 15545,1025 r90 top value=1uF
C? "CAP_0402_10u_X6S" CAP_0402_H09W07_UN1Q 10825,1020 r0 top value=10uF
C? "CAP_0201_15p" CAP_0201_UN1Q 13330,1025 r90 top value=15pF
C? "CAP_0201_100n_X7S_16V" CAP_0201_UN1Q 7910,1025 r90 top value=100nF
C? "CAP_0201_100n_X7S_16V" CAP_0201_UN1Q 7740,1025 r90 top value=100nF
C? "CAP_0201_12pF_RF_MATCHING" CAP_0201_UN1Q 12135,9845 r90 top value=12pF
C? "CAP_0201_100n_X7S_16V" CAP_0201_UN1Q 13145,9845 r90 top value=100nF
C? "CAP_0201_100n_X7S_16V" CAP_0201_UN1Q 12540,9845 r90 top value=100nF
C? "CAP_0201_100n_X7S_16V" CAP_0201_UN1Q 10325,7610 r90 top value=100nF
C? "CAP_0201_100n_X7S_16V" CAP_0201_UN1Q 7060,7610 r90 top value=100nF
C? "CAP_0201_100n_X7S_16V" CAP_0201_UN1Q 9220,9845 r90 top value=100nF
C? "CAP_0402_4u7_10V_X6S" CAP_0402_H09W07_UN1Q 13565,9825 r0 top value=4.7uF
C? "CAP_0201_100n_X7S_16V" CAP_0201_UN1Q 12740,9845 r90 top value=100nF
C? "CAP_0201_100n_X7S_16V" CAP_0201_UN1Q 12340,9845 r90 top value=100nF
C? "CAP_0201_100n_X7S_16V" CAP_0201_UN1Q 11355,9845 r90 top value=100nF
C? "CAP_0805_22uF_10V_X7R" CAP_0805_UN1Q 8485,9825 r0 top value=22uF
C? "CAP_0402_4u7_10V_X6S" CAP_0402_H09W07_UN1Q 13770,9825 r0 top value=4.7uF
C? "CAP_0201_12pF_RF_MATCHING" CAP_0201_UN1Q 11560,9845 r90 top value=12pF
C? "CAP_0201_100n_X7S_16V" CAP_0201_UN1Q 10835,7610 r90 top value=100nF
C? "CAP_0805_2u2_50V_X7R" CAP_0805_UN1Q 30590,7205 r0 top value=2.2uF
C? "CAP_0805_2u2_50V_X7R" CAP_0805_UN1Q 15625,7205 r0 top value=2.2uF
C? "CAP_0805_22uF_10V_X7R" CAP_0805_UN1Q 17785,7205 r0 top value=22uF
C? "CAP_0402_22nF" CAP_0402_UN1Q 15245,7205 r0 top value=22nF
C? "CAP_0402_100nF_50V" CAP_0402_UN1Q 20950,7205 r0 top value=100nF
C? "CAP_0805_2u2_50V_X7R" CAP_0805_UN1Q 14685,7205 r0 top value=2.2uF
C? "CAP_0805_22uF_10V_X7R" CAP_0805_UN1Q 9895,7205 r0 top value=22uF
C? "CAP_0201_100n_X7S_16V" CAP_0201_UN1Q 10665,7610 r90 top value=100nF
C? "CAP_0201_100n_X7S_16V" CAP_0201_UN1Q 7980,7610 r90 top value=100nF
C? "CAP_0201_100n_X7S_16V" CAP_0201_UN1Q 8525,7610 r90 top value=100nF
C? "CAP_1206_10uF_X7R" CAP_1206_UN1Q 25495,7205 r0 top value=10uF
C? "CAP_0805_22uF_10V_X7R" CAP_0805_UN1Q 27165,7205 r0 top value=22uF
C? "CAP_0201_100n_X7S_16V" CAP_0201_UN1Q 10495,7610 r90 top value=100nF
C? "CAP_0201_100n_X7S_16V" CAP_0201_UN1Q 13345,9845 r90 top value=100nF
C? "CAP_0201_100n_X7S_16V" CAP_0201_UN1Q 14005,11200 r90 top value=100nF
C? "CAP_0402_2u2_10V_X6S" CAP_0402_H09W07_UN1Q 11405,11180 r0 top value=2.2uF
C? "CAP_0201_220n_10V_X6S" CAP_0201_UN1Q 10070,11200 r90 top value=220nF
C? "CAP_0201_27p" CAP_0201_UN1Q 12985,10520 r90 top value=27pF
C? "CAP_0201_100n_X7S_16V" CAP_0201_UN1Q 11585,11200 r90 top value=100nF
C? "CAP_0201_220n_10V_X6S" CAP_0201_UN1Q 10995,11200 r90 top value=220nF
C? "CAP_0201_100n_X7S_16V" CAP_0201_UN1Q 8505,11200 r90 top value=100nF
C? "CAP_0201_27p" CAP_0201_UN1Q 13625,11200 r90 top value=27pF
C? "CAP_0805_22uF_10V_X7R" CAP_0805_UN1Q 13845,11180 r0 top value=22uF
C? "CAP_0201_1uF_X6S" CAP_0201_UN1Q 13425,11200 r90 top value=1uF
C? "CAP_0201_220n_10V_X6S" CAP_0201_UN1Q 10270,11200 r90 top value=220nF
C? "CAP_0201_220n_10V_X6S" CAP_0201_UN1Q 10790,11200 r90 top value=220nF
C? "CAP_0201_100n_X7S_16V" CAP_0201_UN1Q 7295,11200 r90 top value=100nF
C? "CAP_0201_100n_X7S_16V" CAP_0201_UN1Q 7500,10520 r90 top value=100nF
C? "CAP_0201_100n_X7S_16V" CAP_0201_UN1Q 7090,10520 r90 top value=100nF
C? "CAP_0805_22uF_10V_X7R" CAP_0805_UN1Q 13205,10500 r0 top value=22uF
C? "CAP_0402_2u2_10V_X6S" CAP_0402_H09W07_UN1Q 11605,10500 r0 top value=2.2uF
C? "CAP_0201_100n_X7S_16V" CAP_0201_UN1Q 12945,9845 r90 top value=100nF
C? "CAP_0201_100n_X7S_16V" CAP_0201_UN1Q 8640,9845 r90 top value=100nF
C? "CAP_0805_22uF_10V_X7R" CAP_0805_UN1Q 9065,9825 r0 top value=22uF
C? "CAP_0201_220n_10V_X6S" CAP_0201_UN1Q 10790,10520 r90 top value=220nF
C? "CAP_0201_220n_10V_X6S" CAP_0201_UN1Q 10995,10520 r90 top value=220nF
C? "CAP_0201_100n_X7S_16V" CAP_0201_UN1Q 13365,10520 r90 top value=100nF
C? "CAP_0201_1uF_X6S" CAP_0201_UN1Q 12785,10520 r90 top value=1uF
C? "CAP_0402_2u2_10V_X6S" CAP_0402_H09W07_UN1Q 11405,10500 r0 top value=2.2uF
C? "CAP_0201_220n_10V_X6S" CAP_0201_UN1Q 10270,10520 r90 top value=220nF
C? "CAP_0201_220n_10V_X6S" CAP_0201_UN1Q 10070,10520 r90 top value=220nF
C? "CAP_0805_22uF_10V_X7R" CAP_0805_UN1Q 21555,7205 r0 top value=22uF
C? "CAP_0805_2u2_50V_X7R" CAP_0805_UN1Q 30770,7205 r0 top value=2.2uF
C? "CAP_0402_100nF_50V" CAP_0402_UN1Q 7860,7205 r0 top value=100nF
C? "CAP_0805_22uF_10V_X7R" CAP_0805_UN1Q 26985,7205 r0 top value=22uF
C? "CAP_0201_2n2" CAP_0201_UN1Q 9140,7185 r90 top value=2.2nF
C? "CAP_0805_22uF_10V_X7R" CAP_0805_UN1Q 22090,7205 r0 top value=22uF
C? "CAP_0402_100nF_50V" CAP_0402_UN1Q 16670,7205 r0 top value=100nF
C? "CAP_0402_100nF_50V" CAP_0402_UN1Q 15040,7205 r0 top value=100nF
C? "CAP_0805_22uF_10V_X7R" CAP_0805_UN1Q 18320,7205 r0 top value=22uF
C? "CAP_0402_100nF_50V" CAP_0402_UN1Q 27515,7205 r0 top value=100nF
C? "CAP_0201_1uF_X6S" CAP_0201_UN1Q 12995,7225 r90 top value=1uF
C? "CAP_0402_100nF_50V" CAP_0402_UN1Q 22265,7205 r0 top value=100nF
C? "CAP_0201_1uF_X6S" CAP_0201_UN1Q 25055,7225 r90 top value=1uF
C? "CAP_0402_100nF_50V" CAP_0402_UN1Q 10070,7205 r0 top value=100nF
C? "CAP_0201_220n_10V_X6S" CAP_0201_UN1Q 14660,4820 r90 top value=220nF
C? "CAP_0402_10u_X6S" CAP_0402_H09W07_UN1Q 22390,4815 r0 top value=10uF
C? "CAP_0201_15p" CAP_0201_UN1Q 9290,4860 r90 top value=15pF
C? "CAP_0201_1uF_X6S" CAP_0201_UN1Q 10780,4860 r90 top value=1uF
C? "CAP_0201_47p" CAP_0201_UN1Q 22880,4820 r90 top value=47pF
C? "CAP_0201_220n_10V_X6S" CAP_0201_UN1Q 16010,4820 r90 top value=220nF
C? "CAP_0201_1n0" CAP_0201_UN1Q 23050,4820 r90 top value=1nF
C? "CAP_0201_100n_X7S_16V" CAP_0201_UN1Q 14320,4820 r90 top value=100nF
C? "CAP_0402_100nF_50V" CAP_0402_UN1Q 21155,7205 r0 top value=100nF
C? "CAP_0402_100nF_50V" CAP_0402_UN1Q 13625,7205 r0 top value=100nF
C? "CAP_0402_10u_X6S" CAP_0402_H09W07_UN1Q 22050,4815 r0 top value=10uF
C? "CAP_0201_100n_X7S_16V" CAP_0201_UN1Q 9830,4820 r90 top value=100nF
C? "CAP_0603_22u_6.3V_X6S" CAP_0603_UN1Q 22745,4825 r0 top value=22uF
C? "CAP_0402_100nF_50V" CAP_0402_UN1Q 30185,7205 r0 top value=100nF
C? "CAP_0805_2u2_50V_X7R" CAP_0805_UN1Q 15445,7205 r0 top value=2.2uF
C? "CAP_0805_22uF_10V_X7R" CAP_0805_UN1Q 9360,7205 r0 top value=22uF
C? "CAP_0805_2u2_50V_X7R" CAP_0805_UN1Q 14865,7205 r0 top value=2.2uF
C? "CAP_0402_22nF" CAP_0402_UN1Q 30390,7205 r0 top value=22nF
C? "CAP_0805_22uF_10V_X7R" CAP_0805_UN1Q 18140,7205 r0 top value=22uF
C? "CAP_0805_22uF_10V_X7R" CAP_0805_UN1Q 21735,7205 r0 top value=22uF
C? "CAP_0402_100nF_50V" CAP_0402_UN1Q 18495,7205 r0 top value=100nF
C? "CAP_0201_10pF_RF_MATCHING" CAP_0201_UN1Q 8970,7185 r90 top value=10pF
C? "CAP_0805_22uF_10V_X7R" CAP_0805_UN1Q 26810,7205 r0 top value=22uF
C? "CAP_1206_10uF_X7R" CAP_1206_UN1Q 28920,7205 r0 top value=10uF
C? "CAP_0805_22uF_10V_X7R" CAP_0805_UN1Q 9540,7205 r0 top value=22uF
C? "CAP_0402_100nF_50V" CAP_0402_UN1Q 26200,7205 r0 top value=100nF
C? "CAP_0805_22uF_10V_X7R" CAP_0805_UN1Q 21910,7205 r0 top value=22uF
C? "CAP_0402_100nF_50V" CAP_0402_UN1Q 13220,7205 r0 top value=100nF
C? "CAP_0402_100nF_50V" CAP_0402_UN1Q 25680,7205 r0 top value=100nF
C? "CAP_0402_100nF_50V" CAP_0402_UN1Q 12815,7205 r0 top value=100nF
C? "CAP_0805_2u2_50V_X7R" CAP_0805_UN1Q 30010,7205 r0 top value=2.2uF
C? "CAP_1206_10uF_X7R" CAP_1206_UN1Q 13435,7205 r0 top value=10uF
C? "CAP_0805_2u2_50V_X7R" CAP_0805_UN1Q 29830,7205 r0 top value=2.2uF
C? "CAP_1206_10uF_X7R" CAP_1206_UN1Q 16480,7205 r0 top value=10uF
C? "CAP_0402_100nF_50V" CAP_0402_UN1Q 25275,7205 r0 top value=100nF
C? "CAP_0402_100nF_50V" CAP_0402_UN1Q 17415,7205 r0 top value=100nF
C? "CAP_0805_22uF_10V_X7R" CAP_0805_UN1Q 9715,7205 r0 top value=22uF
C? "CAP_0402_100nF_50V" CAP_0402_UN1Q 29105,7205 r0 top value=100nF
C? "CAP_0805_22uF_10V_X7R" CAP_0805_UN1Q 17965,7205 r0 top value=22uF
C? "CAP_0805_22uF_10V_X7R" CAP_0805_UN1Q 27340,7205 r0 top value=22uF
C? "CAP_0402_100nF_50V" CAP_0402_UN1Q 24670,7205 r0 top value=100nF
C? "CAP_0201_1uF_X6S" CAP_0201_UN1Q 11830,3100 r90 top value=1uF
C? "CAP_0402_10u_X6S" CAP_0402_H09W07_UN1Q 14060,3080 r0 top value=10uF
C? "CAP_0402_10u_X6S" CAP_0402_H09W07_UN1Q 12455,3080 r0 top value=10uF
C? "CAP_0201_1uF_X6S" CAP_0201_UN1Q 13440,3100 r90 top value=1uF
C? "CAP_0201_1uF_X6S" CAP_0201_UN1Q 14445,3100 r90 top value=1uF
C? "CAP_0201_1uF_X6S" CAP_0201_UN1Q 10220,3100 r90 top value=1uF
C? "CAP_0201_1uF_X6S" CAP_0201_UN1Q 12030,3100 r90 top value=1uF
C? "CAP_0201_1uF_X6S" CAP_0201_UN1Q 11625,3100 r90 top value=1uF
C? "CAP_0402_10u_X6S" CAP_0402_H09W07_UN1Q 10440,3080 r0 top value=10uF
C? "CAP_0201_1uF_X6S" CAP_0201_UN1Q 13235,3100 r90 top value=1uF
C? "CAP_0402_10u_X6S" CAP_0402_H09W07_UN1Q 12655,3080 r0 top value=10uF
C? "CAP_0201_1uF_X6S" CAP_0201_UN1Q 9815,3100 r90 top value=1uF
C? "CAP_0201_1uF_X6S" CAP_0201_UN1Q 14645,3100 r90 top value=1uF
C? "CAP_0201_1uF_X6S" CAP_0201_UN1Q 10820,3100 r90 top value=1uF
C? "CAP_1210_47uF_16V_X6S" CAP_1210_UN1Q_1 9625,1885 r0 top value=47uF
C? "CAP_0201_100n_X7S_16V" CAP_0201_UN1Q 9690,2180 r90 top value=100nF
C? "CAP_0201_100n_X7S_16V" CAP_0201_UN1Q 9890,2180 r90 top value=100nF
C? "CAP_0201_220n_10V_X6S" CAP_0201_UN1Q 9015,1890 r90 top value=220nF
C? "CAP_0201_100n_X7S_16V" CAP_0201_UN1Q 9385,1890 r90 top value=100nF
C? "CAP_0201_18p_RF_MATCHING" CAP_0201_UN1Q 10625,1890 r90 top value=18pF
C? "CAP_0201_12pF_RF_MATCHING" CAP_0201_UN1Q 8510,2810 r90 top value=12pF
C? "CAP_0402_10u_X6S" CAP_0402_H09W07_UN1Q 14265,3080 r0 top value=10uF
C? "CAP_0201_1uF_X6S" CAP_0201_UN1Q 9615,3100 r90 top value=1uF
C? "CAP_0201_1uF_X6S" CAP_0201_UN1Q 10015,3100 r90 top value=1uF
C? "CAP_0201_12pF_RF_MATCHING" CAP_0201_UN1Q 7295,2810 r90 top value=12pF
C? "CAP_0201_12pF_RF_MATCHING" CAP_0201_UN1Q 8715,2810 r90 top value=12pF
C? "CAP_0201_12pF_RF_MATCHING" CAP_0201_UN1Q 7090,2810 r90 top value=12pF
C? "CAP_0201_1uF_X6S" CAP_0201_UN1Q 12835,3100 r90 top value=1uF
C? "CAP_0201_1uF_X6S" CAP_0201_UN1Q 9490,4860 r90 top value=1uF
C? "CAP_0402_10u_X6S" CAP_0402_H09W07_UN1Q 22220,4815 r0 top value=10uF
C? "CAP_0201_15p" CAP_0201_UN1Q 8530,4860 r90 top value=15pF
C? "CAP_0201_100n_X7S_16V" CAP_0201_UN1Q 8905,4820 r90 top value=100nF
C? "CAP_0201_10n_16V" CAP_0201_UN1Q 18230,4860 r90 top value=10nF
C? "CAP_0201_100n_X7S_16V" CAP_0201_UN1Q 10950,4820 r90 top value=100nF
C? "CAP_0201_1uF_X6S" CAP_0201_UN1Q 11670,4860 r90 top value=1uF
C? "CAP_0402_10u_X6S" CAP_0402_H09W07_UN1Q 21880,4815 r0 top value=10uF
C? "CAP_0201_100n_X7S_16V" CAP_0201_UN1Q 11840,4820 r90 top value=100nF
C? "CAP_0402_10u_X6S" CAP_0402_H09W07_UN1Q 14510,4815 r0 top value=10uF
C? "CAP_0402_10u_X6S" CAP_0402_H09W07_UN1Q 22560,4815 r0 top value=10uF
C? "CAP_0201_100n_X7S_16V" CAP_0201_UN1Q 9660,4820 r90 top value=100nF
C? "CAP_0201_100n_X7S_16V" CAP_0201_UN1Q 21685,4820 r90 top value=100nF
C? "CAP_0201_100n_X7S_16V" CAP_0201_UN1Q 12010,4820 r90 top value=100nF
C? "CAP_0201_1uF_X6S" CAP_0201_UN1Q 12230,3100 r90 top value=1uF
C? "CAP_0201_1uF_X6S" CAP_0201_UN1Q 10620,3100 r90 top value=1uF
C? "CAP_0201_1uF_X6S" CAP_0201_UN1Q 13035,3100 r90 top value=1uF
C? "CAP_0201_1uF_X6S" CAP_0201_UN1Q 11025,3100 r90 top value=1uF
C? "CAP_0201_100n_X7S_16V" CAP_0201_UN1Q 12875,4570 r90 top value=100nF
C? "CAP_0201_100n_X7S_16V" CAP_0201_UN1Q 9175,4570 r90 top value=100nF
C? "CAP_0201_1uF_X6S" CAP_0201_UN1Q 11905,4570 r90 top value=1uF
C? "CAP_0201_100n_X7S_16V" CAP_0201_UN1Q 12670,4570 r90 top value=100nF
C? "CAP_0201_1uF_X6S" CAP_0201_UN1Q 11305,4570 r90 top value=1uF
C? "CAP_0201_1uF_X6S" CAP_0201_UN1Q 9615,1025 r90 top value=1uF
C? "CAP_0402_10u_X6S" CAP_0402_H09W07_UN1Q 16585,1020 r0 top value=10uF
C? "CAP_0201_100n_X7S_16V" CAP_0201_UN1Q 14695,1025 r90 top value=100nF
C? "CAP_0201_100n_X7S_16V" CAP_0201_UN1Q 14185,1025 r90 top value=100nF
C? "CAP_0201_1uF_X6S" CAP_0201_UN1Q 10295,1025 r90 top value=1uF
C? "CAP_0201_1uF_X6S" CAP_0201_UN1Q 15375,1025 r90 top value=1uF
C? "CAP_0201_100n_X7S_16V" CAP_0201_UN1Q 8760,1025 r90 top value=100nF
C? "CAP_0201_1uF_X6S" CAP_0201_UN1Q 17900,1025 r90 top value=1uF
C? "CAP_0201_15p" CAP_0201_UN1Q 7570,1025 r90 top value=15pF
C? "CAP_0201_100n_X7S_16V" CAP_0201_UN1Q 8930,1025 r90 top value=100nF
C? "CAP_0201_1uF_X6S" CAP_0201_UN1Q 10465,1025 r90 top value=1uF
C? "CAP_0201_100n_X7S_16V" CAP_0201_UN1Q 13670,1025 r90 top value=100nF
C? "CAP_0201_100n_X7S_16V" CAP_0201_UN1Q 15035,1025 r90 top value=100nF
C? "CAP_0201_100n_X7S_16V" CAP_0201_UN1Q 14525,1025 r90 top value=100nF
C? "CAP_0201_100n_X7S_16V" CAP_0201_UN1Q 8590,1025 r90 top value=100nF
C? "CAP_0201_1uF_X6S" CAP_0201_UN1Q 16225,1025 r90 top value=1uF
C? "CAP_0402_10u_X6S" CAP_0402_H09W07_UN1Q 11165,1020 r0 top value=10uF
C? "CAP_0201_100n_X7S_16V" CAP_0201_UN1Q 16735,1025 r90 top value=100nF
C? "CAP_0201_100n_X7S_16V" CAP_0201_UN1Q 10975,1025 r90 top value=100nF
C? "CAP_0201_1uF_X6S" CAP_0201_UN1Q 15205,1025 r90 top value=1uF
C? "CAP_0201_1uF_X6S" CAP_0201_UN1Q 9445,1025 r90 top value=1uF
C? "CAP_0201_100n_X7S_16V" CAP_0201_UN1Q 8080,1025 r90 top value=100nF
C? "CAP_0201_1uF_X6S" CAP_0201_UN1Q 11970,1025 r90 top value=1uF
C? "CAP_0201_1uF_X6S" CAP_0201_UN1Q 16055,1025 r90 top value=1uF
C? "CAP_0201_100n_X7S_16V" CAP_0201_UN1Q 9275,1025 r90 top value=100nF
C? "CAP_0402_10u_X6S" CAP_0402_H09W07_UN1Q 16925,1020 r0 top value=10uF
C? "CAP_0201_15p" CAP_0201_UN1Q 7230,1025 r90 top value=15pF
C? "CAP_0201_1uF_X6S" CAP_0201_UN1Q 17730,1025 r90 top value=1uF
C? "CAP_0201_100n_X7S_16V" CAP_0201_UN1Q 13500,1025 r90 top value=100nF
C? "CAP_0201_1uF_X6S" CAP_0201_UN1Q 7465,1435 r90 top value=1uF
C? "CAP_0201_100n_X7S_16V" CAP_0201_UN1Q 8420,1025 r90 top value=100nF
C? "CAP_0402_10u_X6S" CAP_0402_H09W07_UN1Q 14885,1020 r0 top value=10uF
C? "CAP_0402_10u_X6S" CAP_0402_H09W07_UN1Q 9125,1020 r0 top value=10uF
C? "CAP_0201_1uF_X6S" CAP_0201_UN1Q 8530,1435 r90 top value=1uF
C? "CAP_0201_2n2" CAP_0201_UN1Q 7060,1395 r90 top value=2.2nF
C? "CAP_0402_10u_X6S" CAP_0402_H09W07_UN1Q 8835,1870 r0 top value=10uF
C? "CAP_0201_100n_X7S_16V" CAP_0201_UN1Q 8915,1435 r90 top value=100nF
C? "CAP_0201_100n_X7S_16V" CAP_0201_UN1Q 9115,1435 r90 top value=100nF
C? "CAP_0201_1uF_X6S" CAP_0201_UN1Q 7265,1435 r90 top value=1uF
C? "CAP_0201_1uF_X6S" CAP_0201_UN1Q 9785,1025 r90 top value=1uF
C? "CAP_0201_100n_X7S_16V" CAP_0201_UN1Q 14015,1025 r90 top value=100nF
C? "CAP_0201_100n_X7S_16V" CAP_0201_UN1Q 13845,1025 r90 top value=100nF
C? "CAP_0201_1uF_X6S" CAP_0201_UN1Q 12140,1025 r90 top value=1uF
C? "CAP_0201_1uF_X6S" CAP_0201_UN1Q 15715,1025 r90 top value=1uF